# Altium PCB PCB1.PcbDoc
Units mm, origin at the board's own origin, x right, y up, seen from the top; angles counter-clockwise.
Board outline 22 x 22 mm, 2 copper layers (Top Layer, Bottom Layer), stack 1.273 mm thick; 16 components, 8 nets, 47 pads, 37 vias.
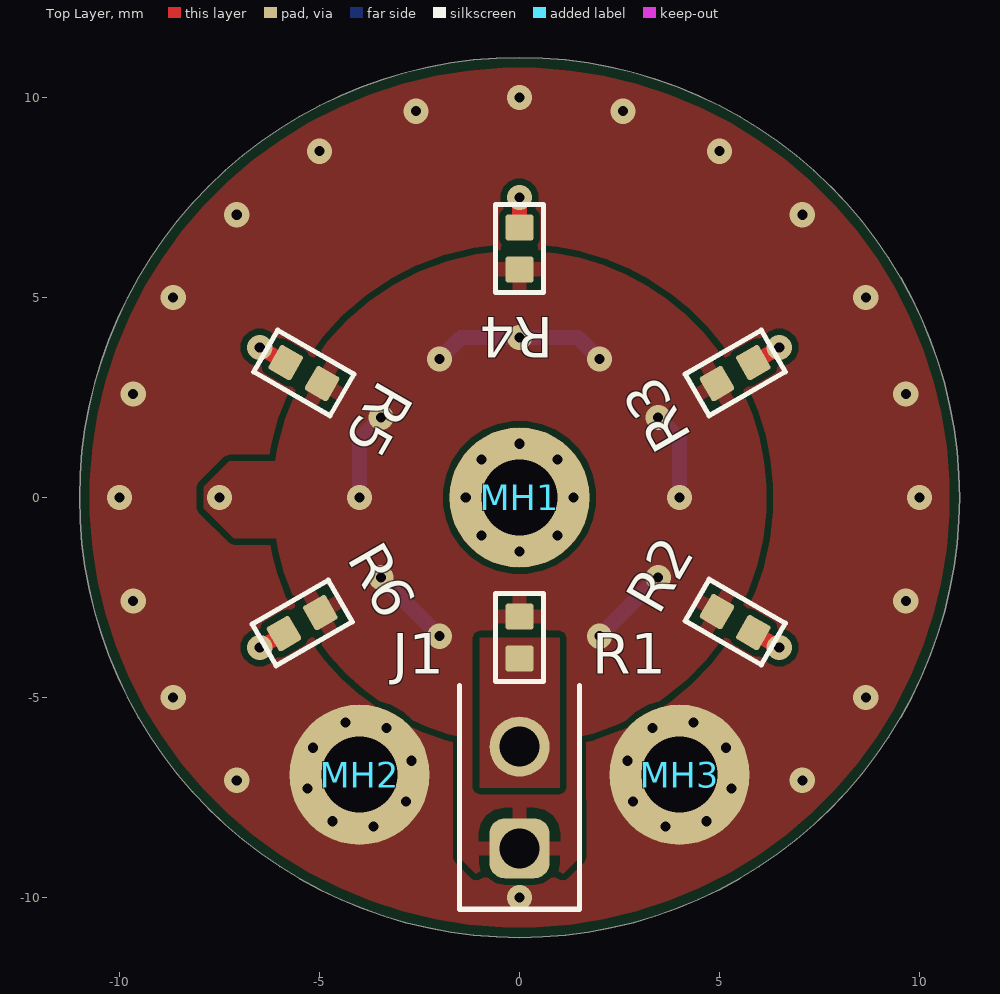
[diagram p0: Top Layer view]
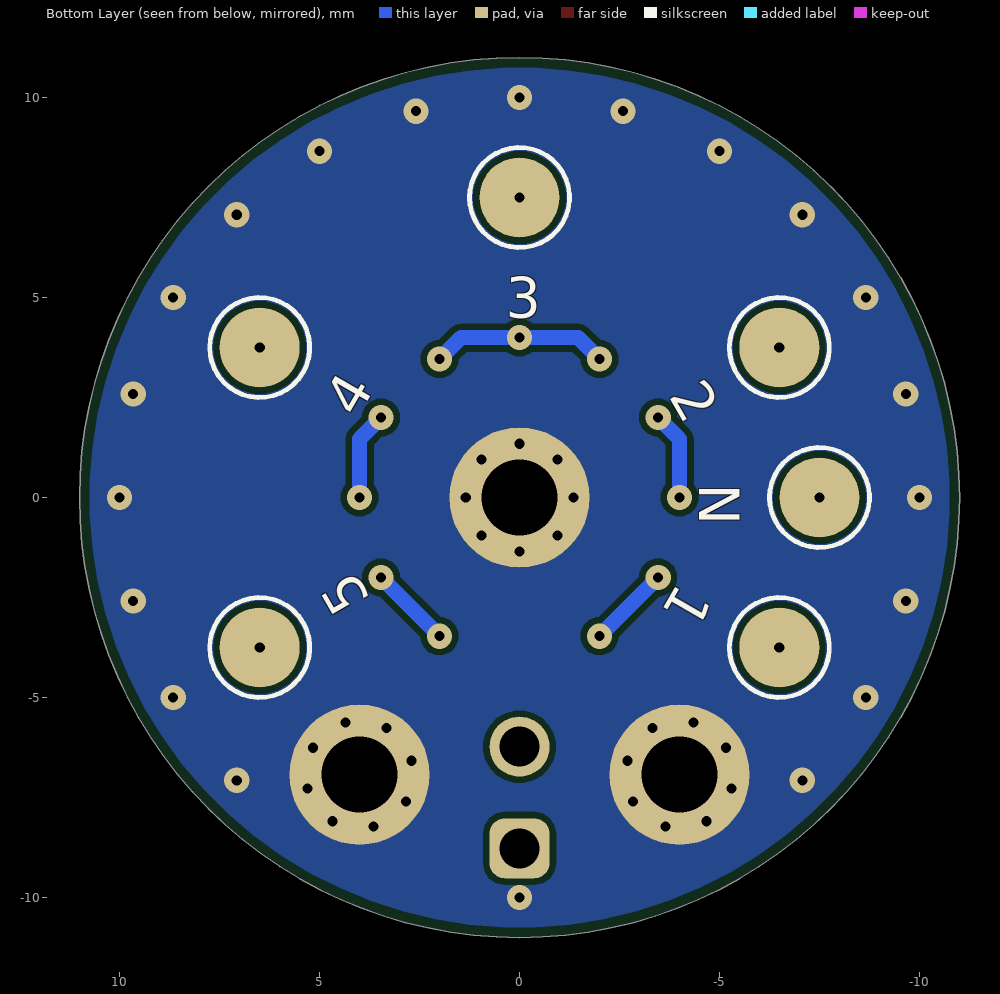
[diagram p1: Bottom Layer view, seen from below]
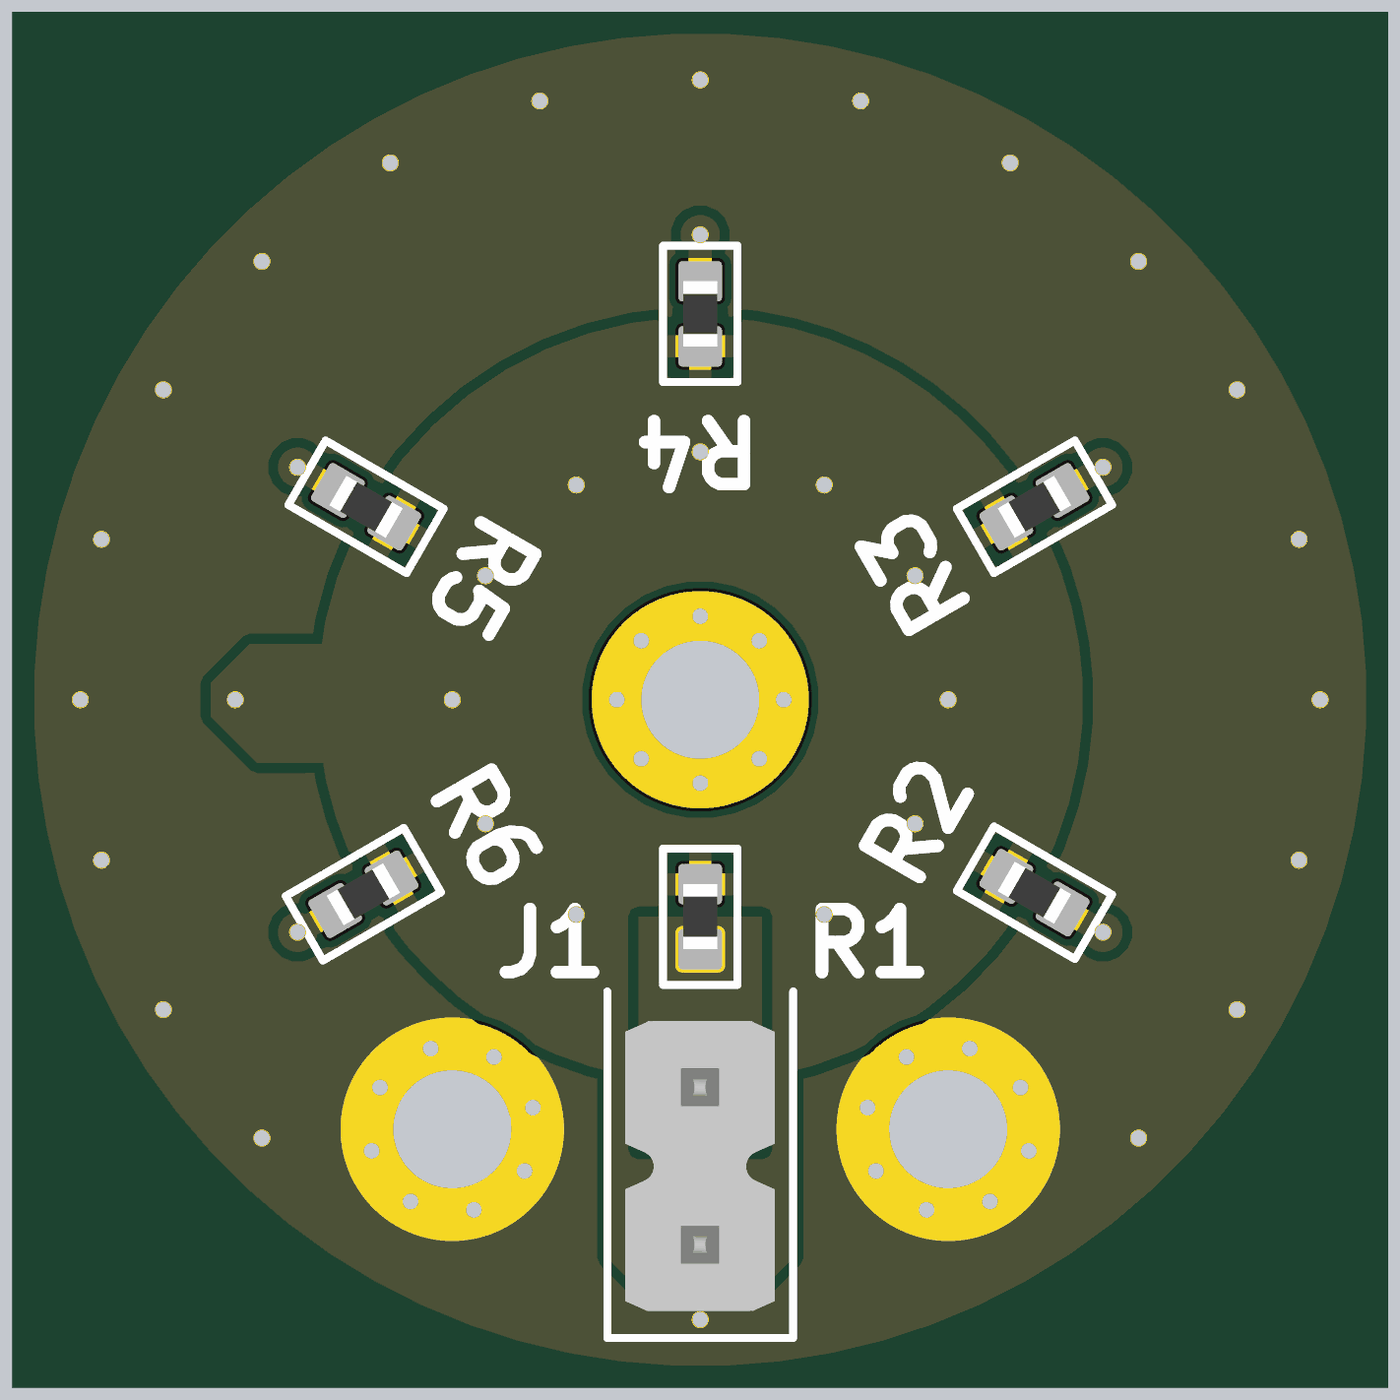
[diagram p2: 3D render of the assembled board from above, using the file's embedded part models]

## Layer stack, top to bottom
Top Solder: solder mask 0.0102, Solder Resist, Dk 3.5
Top Layer: signal copper 0.07
Dielectric 1: prepreg 0.0711, PP-006, Dk 4.1
Dielectric 3: core 0.9906, Core-042, Dk 4.6
Dielectric 5: prepreg 0.0711, PP-006, Dk 4.1
Bottom Layer: signal copper 0.07
Bottom Solder: solder mask 0.0102, Solder Resist, Dk 3.5

## Board outline
0,-11 cw(c0,0) -11,0 cw(c0,0) 0,11 cw(c0,0) 11,0 cw(c0,0)

## Design rules (kind name [scope] priority, off if disabled: settings)
AcuteAngle [All] p1: minimum=5.90000000000000E+0001 checktracksonly=TRUE
BoardOutlineClearance [All] p1: gap=0.254 ignorepadtopadclearanceinfootprint=FALSE except(0: Arc-SplitContinuation Track-SplitContinuation SMDPad-SplitContinuation THPad-SplitContinuation Via-SplitContinuation Fill-SplitContinuation Poly-SplitContinuation Region-SplitContinuation Text-SplitContinuation)
Clearance [All] p1: gap=0.152 ignorepadtopadclearanceinfootprint=FALSE
ComponentClearance [All] p1: gap=0.254 collisioncheckmode=3 verticalgap=2540 showdistances=FALSE
HoleSize [All] p1: absolutevalues=TRUE maxlimit=7.62 minlimit=0.152 maxpercent=80.000 minpercent=20.000
MinimumAnnularRing [All] p1: minimumring=0.127
MinimumSolderMaskSliver [All] p1: minsoldermaskwidth=0.102
PlaneClearance [All] p1: clearance=0.254
PlaneConnect [All] p1: pad.planeconnectstyle=Relief pad.reliefexpansion=0.381 pad.reliefentries=4 pad.reliefconductorwidth=0.356 pad.reliefairgap=0.254 via.planeconnectstyle=Direct via.reliefexpansion=0.508 via.reliefentries=4 via.reliefconductorwidth=0.254 via.reliefairgap=0.254
PolygonConnect PolygonConnect_1 [InNet('5V')] p1: connectstyle=Direct reliefconductorwidth=0.254 reliefentries=4 polygonreliefangle="90 Angle" airgapwidth=0.254
PolygonConnect [All] p2: thpad.connectstyle=Relief thpad.reliefconductorwidth=0.356 thpad.reliefentries=4 thpad.polygonreliefangle="90 Angle" thpad.airgapwidth=0.254 smdpad.connectstyle=Relief smdpad.reliefconductorwidth=0.356 smdpad.reliefentries=4 smdpad.polygonreliefangle="90 Angle" smdpad.airgapwidth=0.254 via.connectstyle=Direct via.reliefconductorwidth=0.254 via.reliefentries=4 via.polygonreliefangle="90 Angle" via.airgapwidth=0.254
RoomDefinition _TOP [InComponentClass('_TOP')] p1 off: confinementstyle=ConfineIn formatcopy=TRUE lockcomponents=FALSE outline 13.5,-10.9 111,-10.9 111,1 13.5,1
RoutingVias [All] p1: holewidth=0.254 width=0.508 viastyle="Through Hole" minholewidth=0.152 minwidth=0.406 maxholewidth=2.032 maxwidth=2.54
SMDEntry [All] p1: side=TRUE corner=TRUE anyangle=FALSE
SilkToSolderMaskClearance [IsPad] p1: minsilkscreentomaskgap=0.076 clearancetoexposedcopper=FALSE
SolderMaskExpansion [All] p1: expansion=0.051 istentingtop=FALSE
Width [All] p1: maxlimit=12.7 minlimit=0.152 preferedwidth=0.254
24 further rules are at their usual default settings.

## Components (designator, comment, footprint, x,y, rotation, side; value= is the part's Value field where it differs from the comment)
1 "TestPad SMT Large" TEST_POINT_SMD_LARGE -6.495,-3.75 r30 bottom (schematic designator TP6)
2 "TestPad SMT Large" TEST_POINT_SMD_LARGE -6.495,3.75 r330 bottom (schematic designator TP4)
3 "TestPad SMT Large" TEST_POINT_SMD_LARGE 0,7.5 r270 bottom (schematic designator TP3)
4 "TestPad SMT Large" TEST_POINT_SMD_LARGE 6.495,3.75 r210 bottom (schematic designator TP2)
5 "TestPad SMT Large" TEST_POINT_SMD_LARGE 6.495,-3.75 r150 bottom (schematic designator TP1)
J1 "PINHEAD, 2x1, 100mil, Pins" "PINHEAD 2 x 1 100MIL PIN" 0,-7.5 r90 top
MH1 "MH #0 NAS620 washer" MH_0_NAS620 0,0 r0 top
MH2 "MH #0 NAS620 washer" MH_0_NAS620 -4,-6.928 r240 top
MH3 "MH #0 NAS620 washer" MH_0_NAS620 4,-6.928 r300 top
N "TestPad SMT Large" TEST_POINT_SMD_LARGE -7.5,0 r0 bottom (schematic designator TP5)
R1 "R 0402 1.00k 1% 0.063W ±100PPM/°C 50V AEC-Q200" R_0402 0,-3.5 r270 top
R2 "R 0402 10.0k 1% 0.063W ±100PPM/°C 50V AEC-Q200" R_0402 5.391,-3.112 r150 top
R3 "R 0402 10.0k 1% 0.063W ±100PPM/°C 50V AEC-Q200" R_0402 5.391,3.112 r210 top
R4 "R 0402 10.0k 1% 0.063W ±100PPM/°C 50V AEC-Q200" R_0402 0,6.225 r270 top
R5 "R 0402 10.0k 1% 0.063W ±100PPM/°C 50V AEC-Q200" R_0402 -5.391,3.112 r330 top
R6 "R 0402 10.0k 1% 0.063W ±100PPM/°C 50V AEC-Q200" R_0402 -5.434,-3.137 r30 top

## Footprints (in the part's own frame and the unit in brackets; to place one, negate y for a bottom-side part, rotate by r counter-clockwise, add the part's x,y. Pads: shape width x height; smd on the part's side, far side on the other; paste and mask are expansions set on the pad)
MH_0_NAS620 [mil] "Mounting Hole, Plated; 138 mil Pad, 75 mil Hole (with 8 vias)"
  round 25 hole 10 paste-14.96 mask-14.96: 1(-52.99,0) 1(-37.48,-37.48) 1(-37.48,37.48) 1(0,-52.99) 1(0,52.99) 1(37.48,-37.48) 1(37.48,37.48) 1(52.99,0)
  round 138 hole 75 paste-137.99 mask+1.97: 1(0,0)
"PINHEAD 2 x 1 100MIL PIN" [mm]
  rrect50% 1.5x1.5 hole 1: 1(-1.27,0)
  round 1.5 hole 1: 2(1.27,0)
  silkscreen extent -2.79,-1.5 2.79,1.5, body extent -2.36,-1.2 2.32,1.21, height 8.4
R_0402 [mm] "Resistor, 0402"
  rrect20% 0.65x0.7 smd: 1(-0.525,0) 2(0.525,0)
  silkscreen extent -1.1,-0.6 1.1,0.6, body extent -0.52,-0.27 0.53,0.28, height 0.4
TEST_POINT_SMD_LARGE [mm]
  round 2 smd paste-1 mask+0.05: 1(0,0)
  silkscreen extent -1.25,-1.25 1.25,1.25

## Part data
1 2 3 4 5 N: library part CMP-ROOT-00011-5, "Test pad 2mm", Case/Package=2mm, Mount=SMD, Pins=1, RoHS=Yes
J1: library part CMP-ROOT-00005-3, "Headers & Wire Housings 2.54MM CGRIDIII HDR 2P VERT SR SEL AU", Case/Package=Through-hole, Color=Black, Current Rating=3A, Max Operating Temperature="125 C", Max Voltage Rating (DC)=350.35, Min Operating Temperature="-55 C", Package Quantity=6000, Voltage Rating=350, Contact Gender=Pins, Contact Material=Brass,Copper,Gold, Contact Plating=Gold, Gender=Pins, Glow Wire Compliant=Non-compliant, Housing Color=Black, Housing Material=Polyester, Lead Pitch=2.54mm, Material=Brass, Mount="Through Hole", Number of Circuits=2, Number of Contacts=2, Number of Positions=2, Number of Rows=1, Orientation=Straight, Packaging=Tray, Pins=2, Pitch=2.54, Radiation Hardening=No, REACH SVHC=Unknown, RoHS=Yes, Termination=Solder
MH1 MH2 MH3: library part CMP-ROOT-00064-2, Case/Package=#0, Mount=TH, RoHS=Yes
R1: library part CMP-08898-2, "SMD Resistor, Thick Film, Automotive", Case/Package=0402, Max Operating Temperature=155°C, Min Operating Temperature=-55°C, Power Rating=63mW, Resistance=1k, Temperature Coefficient=±100ppm/°C, Tolerance=1%, Voltage Rating=50V, Composition="Thick Film", Qualification=AEC-Q200, RoHS=Compliant
R2 R3 R4 R5 R6: library part CMP-09036-2, "SMD Resistor, Thick Film, Automotive", Case/Package=0402, Max Operating Temperature=155°C, Min Operating Temperature=-55°C, Power Rating=63mW, Resistance=10k, Temperature Coefficient=±100ppm/°C, Tolerance=1%, Voltage Rating=50V, Composition="Thick Film", Qualification=AEC-Q200, RoHS=Compliant

## Via types
v1: diameter 0.635, hole 0.254, Top Layer to Bottom Layer, tented both sides, 37 vias

## Nets (pads, with @x,y where several pads share a name; then routed paths per layer and width w, separated by ;. In a path a pad name is that pad's centre, name@x,y a point inside that pad or via, vN(x,y) a via of type N, cw(c..) or ccw(c..) an arc to the next point about the centre after c; other vN are vias at no path point)
5V: J1.2 R1.2
GND: MH1.1 MH2.1 MH3.1
  other v1: 0,-10 -7.071,-7.071 7.071,-7.071 -8.66,-5 8.66,-5 -9.659,-2.588 9.659,-2.588 -10,0 10,0 -9.659,2.588 9.659,2.588 -8.66,5 8.66,5 -7.071,7.071 7.071,7.071 -5,8.66 5,8.66 -2.588,9.659 2.588,9.659 0,10
NetR2_1: 5.1 R2.1 | length 0.8
  Top Layer w0.381: R2.1 6.127,-3.537 v1(6.495,-3.75)
NetR3_1: 4.1 R3.1 | length 0.8
  Top Layer w0.381: R3.1 6.127,3.537 v1(6.495,3.75)
NetR4_1: 3.1 R4.1 | length 0.8
  Top Layer w0.381: R4.1 v1(0,7.5)
NetR5_1: 2.1 R5.1 | length 0.8
  Top Layer w0.381: v1(-6.495,3.75) -6.127,3.537 R5.1
NetR6_1: 1.1 R6.1 | length 0.7
  Top Layer w0.381: v1(-6.495,-3.75) -6.17,-3.562 R6.1
VOUT: J1.1 N.1 R1.1 R2.2 R3.2 R4.2 R5.2 R6.2 | length 13
  Bottom Layer w0.381: v1(-4,0) -4,1.464 v1(-3.464,2) ; v1(-3.464,-2) v1(-2,-3.464) ; v1(-2,3.464) -1.464,4 v1(0,4) 1.464,4 v1(2,3.464) ; v1(2,-3.464) v1(3.464,-2) ; v1(3.464,2) 4,1.464 v1(4,0)
  other v1: -7.5,0

## Polygon pours and split planes (outlines as drawn)
5V on Top Layer "5V" (solid, pour order 0): -1,-3.5 -1,-7.25 1,-7.25 1,-3.5
VOUT on Top Layer "VOUT" (solid, remove dead copper, pour order 2): -6.103,0.905 -7.259,0.905 -7.898,0.266 -7.898,-0.266 -7.145,-1.019 -6.085,-1.018 ccw(c0,0) -1.496,-5.985 -1.496,-9.004 -1,-9.5 1,-9.5 1.501,-8.999 1.496,-5.985 ccw(c0,0) 6.17,0 ccw(c0,0) 0,6.17 ccw(c0,0)
GND on Top Layer "GND" (solid, remove dead copper, pour order 3): 0,-11.105 cw(c0,0) -11.105,0 cw(c0,0) 0,11.105 cw(c0,0) 11.105,0 cw(c0,0)
GND on Bottom Layer "GND_2" (solid, remove dead copper, pour order 1): 0,-11.105 cw(c0,0) -11.105,0 cw(c0,0) 0,11.105 cw(c0,0) 11.105,0 cw(c0,0)

## Silkscreen, mask and mechanical layers (free items; w line width, h text height)
Board:
  circle w0.2: c0,0 r11